# EAGLE board otopark sistem (EAGLE 9.7.0)

Size 184.57 x 155.52 mm. Coordinates in mm from the lower left corner, seen from the top.
Outline: 0,0 184.57,0 184.57,155.52 0,155.52 0,0
Copper layers (1*16): Top 0.035mm / dielectric 1.5mm / Bottom 0.035mm
Design rules "default": minimum track width 6mil, minimum drill 0.35mm, track to track 6mil, track to pad 6mil, pad to pad 6mil, via to via 6mil, smd to smd 6mil, copper to edge 40mil, drill to drill 6mil, minimum pad ring 10mil, minimum via ring 8mil, stop-mask expansion 4mil, vias tented up to drill 0mil, thermal gap 10mil

## Footprints (pad centres in the part's own frame; a part is rotated, then mirrored left to right if it is on the bottom)
LEDRD254W60D565H860B_G = drill 0.981 pad 1.581: 1 -1.27,0; 2 1.27,0
LEDRD254W60D565H860B = drill 0.981 pad 1.581: 1 -1.27,0; 2 1.27,0
MOTOR = drill 1.118 pad 3.15 octagon: + 2.54,0; - -2.54,0
RESAD1016W63L850D250B = drill 0.83 pad 1.43: 1 -5.08,0; 2 5.08,0
HA-06-SM065 = drill 1 pad 1.676: 1 -2.54,-2.54; 2 0,2.54; 3 2.54,-2.54
SWITCH-MOMENTARY-PTH-6.5MM = drill 1.016 pad 1.88: 1 -3.251,2.261; 2 3.251,2.261; 3 -3.251,-2.261; 4 3.251,-2.261
SG90 = drill 1.016 long: 1 -2.54,0; 2 0,0; 3 2.54,0
ARDUINO-UNO-R3-SHIELD = drill 1.016 pad 1.88: 3.3V 24.13,-2.54; 5V 24.13,0; A0 24.13,12.7; A1 24.13,15.24; A2 24.13,17.78; A3 24.13,20.32; A4 24.13,22.86; A5 24.13,25.4; AREF -24.13,-13.97; D2 -24.13,20.32; D3 -24.13,17.78; D4 -24.13,15.24; D5 -24.13,12.7; D6 -24.13,10.16; D7 -24.13,7.62; D8 -24.13,3.81; D9 -24.13,1.27; D10 -24.13,-1.27; D11 -24.13,-3.81; D12 -24.13,-6.35; D13 -24.13,-8.89; GND@0 24.13,2.54; GND@1 24.13,5.08; GND@2 -24.13,-11.43; IOREF 24.13,-7.62; NC 24.13,-10.16; RES 24.13,-5.08; RX -24.13,25.4; SCL -24.13,-19.05; SDA -24.13,-16.51; TX -24.13,22.86; VIN 24.13,7.62
JHD-162A = drill 1.016 long: 1 -19.05,0; 2 -16.51,0; 3 -13.97,0; 4 -11.43,0; 5 -8.89,0; 6 -6.35,0; 7 -3.81,0; 8 -1.27,0; 9 1.27,0; 10 3.81,0; 11 6.35,0; 12 8.89,0; 13 11.43,0; 14 13.97,0; 15 16.51,0; 16 19.05,0

## Placement (x,y rotation side)
D1  GREEN  [LEDRD254W60D565H860B_G]  6.06,147.11 180 top
D2  RED  [LEDRD254W60D565H860B]  13,147.08 180 top
D3  RED  [LEDRD254W60D565H860B]  41.83,147.22 180 top
D4  GREEN  [LEDRD254W60D565H860B_G]  36.14,147.38 180 top
D5  GREEN  [LEDRD254W60D565H860B_G]  68.08,147.35 180 top
D6  RED  [LEDRD254W60D565H860B]  73.95,147.53 180 top
D7  GREEN  [LEDRD254W60D565H860B_G]  107.56,146.57 180 top
D8  RED  [LEDRD254W60D565H860B]  112.89,146.2 180 top
D9  GREEN  [LEDRD254W60D565H860B_G]  128.46,147.37 180 top
D10  RED  [LEDRD254W60D565H860B]  138.59,147.61 180 top
M1  MOTOR_HDR  [MOTOR]  28.42,28.02 180 top
R1  10k  [RESAD1016W63L850D250B]  29.6,48.01 90 top
R2  10k  [RESAD1016W63L850D250B]  48.97,48.01 90 top
R3  10k  [RESAD1016W63L850D250B]  159.57,57.52 90 top
R4  1k  [RESAD1016W63L850D250B]  14.27,142 90 top
R5  1k  [RESAD1016W63L850D250B]  37.41,142.3 90 top
R6  1k  [RESAD1016W63L850D250B]  43.1,142.14 90 top
R7  1k  [RESAD1016W63L850D250B]  69.35,142.27 90 top
R8  1k  [RESAD1016W63L850D250B]  75.22,142.45 90 top
R9  1k  [RESAD1016W63L850D250B]  108.83,141.49 90 top
R10  1k  [RESAD1016W63L850D250B]  114.16,141.12 90 top
R11  1k  [RESAD1016W63L850D250B]  129.73,142.29 90 top
R12  1k  [RESAD1016W63L850D250B]  139.86,142.53 90 top
R13  1k  [RESAD1016W63L850D250B]  7.33,142.03 90 top
RPOT1  250k  [HA-06-SM065]  69.68,24.26 0 top
SENTRY  SWITCH_MOMENTARY  [SWITCH-MOMENTARY-PTH-6.5MM]  40.27,63.64 90 top
SERVO1  SERVOSG90  [SG90]  177.58,97.04 0 top
SEXIST  SWITCH_MOMENTARY  [SWITCH-MOMENTARY-PTH-6.5MM]  24.04,64.47 90 top
U4  ARDUINO-UNO-R3-SHIELD  [ARDUINO-UNO-R3-SHIELD]  114.74,75.49 270 top
U5  LCD-16X2JHD-162A  [JHD-162A]  117.94,36.63 0 top

## Library data of the parts
D1 D4 D5 D7 D9 = Tinkercad; CATEGORY: Opto-Electronic; SUB-CATEGORY: LED; VALUE: LED_GREEN
D2 D3 D6 D8 D10 = Tinkercad; CATEGORY: Opto-Electronic; SUB-CATEGORY: LED; VALUE: LED_RED
M1 R1-R13 RPOT1 SENTRY SERVO1 SEXIST U4 U5 = Tinkercad

## Nets
D1_A: D1.1 R13.2
D2_A: D2.1 R4.2
D3_A: D3.1 R6.2
D4_A: D4.1 R5.2
D5_A: D5.1 R7.2
D6_A: D6.1 R8.2
D7_A: D7.1 R9.2
D8_A: D8.1 R10.2
D9_A: D9.1 R11.2
D10_A: D10.1 R12.2
U4_5V: R3.2 RPOT1.1 SERVO1.2 U4.5V U5.2
U4_D2: R9.1 R10.1 R11.1 R12.1 U4.D2 U5.14
U4_D3: U4.D3 U5.13
U4_D4: U4.D4 U5.12
U4_D5: U4.D5 U5.11
U4_D6: M1.+ SENTRY.1 SEXIST.1 U4.D6
U4_D7: SERVO1.3 U4.D7
U4_D8: R2.2 SENTRY.4 U4.D8
U4_D9: R1.2 SEXIST.4 U4.D9
U4_D10: M1.- R1.1 R2.1 U4.D10
U4_D11: U4.D11 U5.6
U4_D12: R4.1 R5.1 R6.1 R7.1 R8.1 R13.1 U4.D12 U5.4
U4_GND: D1.2 D2.2 D3.2 D4.2 D5.2 D6.2 D7.2 D8.2 D9.2 D10.2 RPOT1.3 SERVO1.1 U4.GND@0 U4.GND@1 U4.GND@2 U5.1 U5.5 U5.16
U5_LED+: R3.1 U5.15
U5_VO: RPOT1.2 U5.3

## Tracks (layer width: path | path; a pad name or v marks a point on that pad's centre or on a via)
D1_A  (1 unrouted)
D2_A  (1 unrouted)
D3_A  (1 unrouted)
D4_A  (1 unrouted)
D5_A  (1 unrouted)
D6_A  (1 unrouted)
D7_A  (1 unrouted)
D8_A  (1 unrouted)
D9_A  (1 unrouted)
D10_A  (1 unrouted)
U4_5V  (4 unrouted)
U4_D2  (5 unrouted)
U4_D3  (1 unrouted)
U4_D4  (1 unrouted)
U4_D5  (1 unrouted)
U4_D6  (3 unrouted)
U4_D7  (1 unrouted)
U4_D8  (2 unrouted)
U4_D9  (2 unrouted)
U4_D10  (3 unrouted)
U4_D11  (1 unrouted)
U4_D12  (7 unrouted)
U4_GND  (17 unrouted)
U5_LED+  (1 unrouted)
U5_VO  (1 unrouted)